# EAGLE board Mixer (EAGLE 7.7.0)
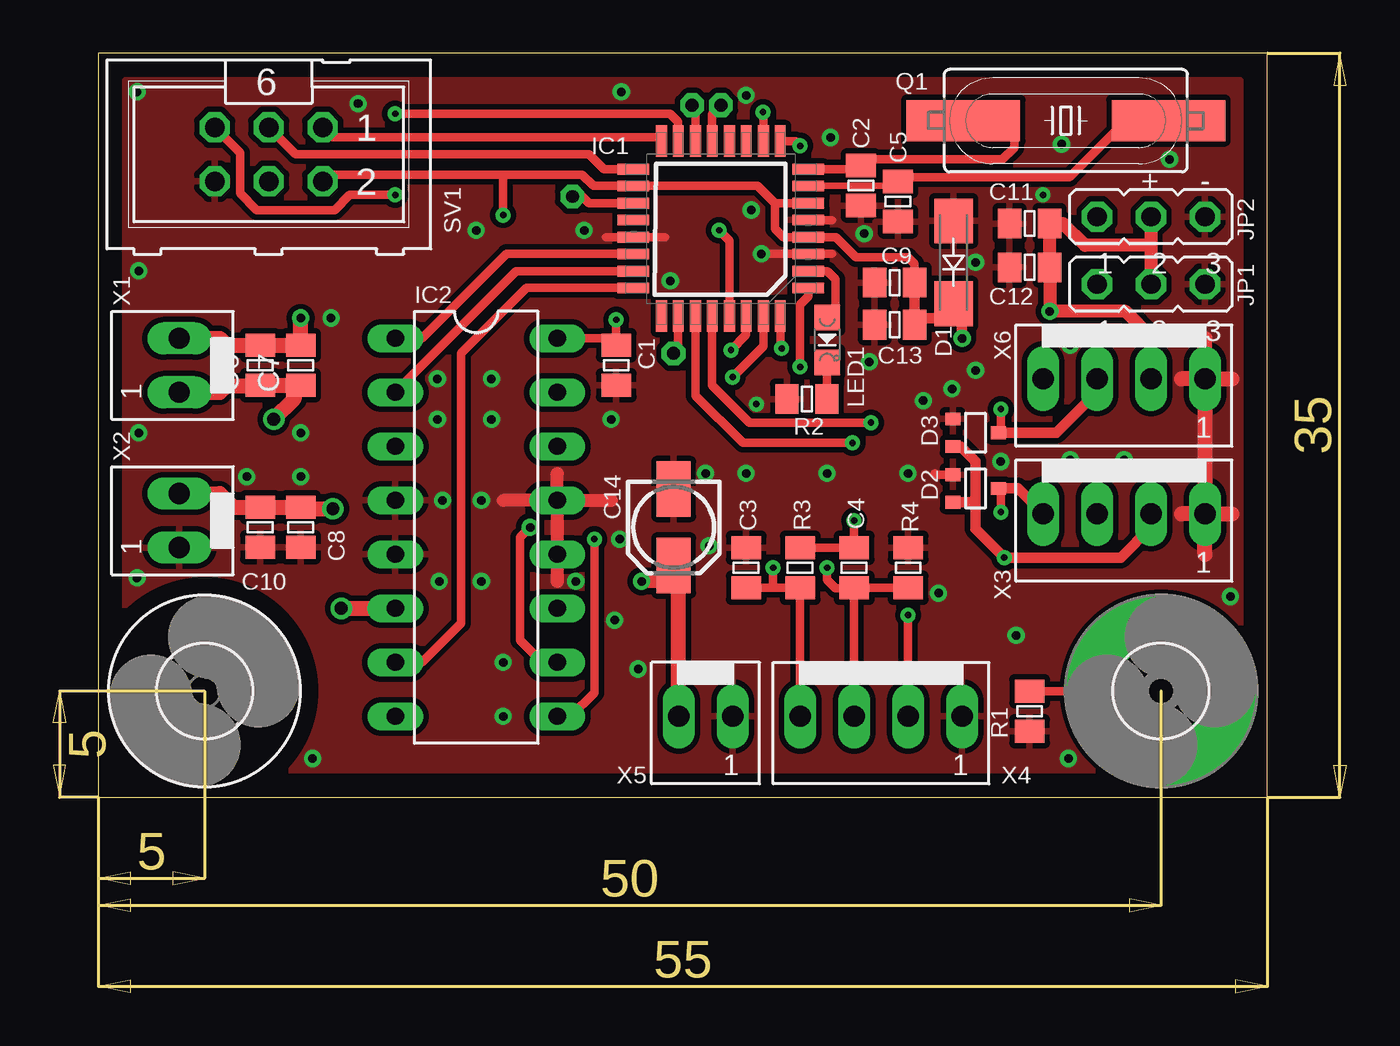
[diagram p0: board, top side]
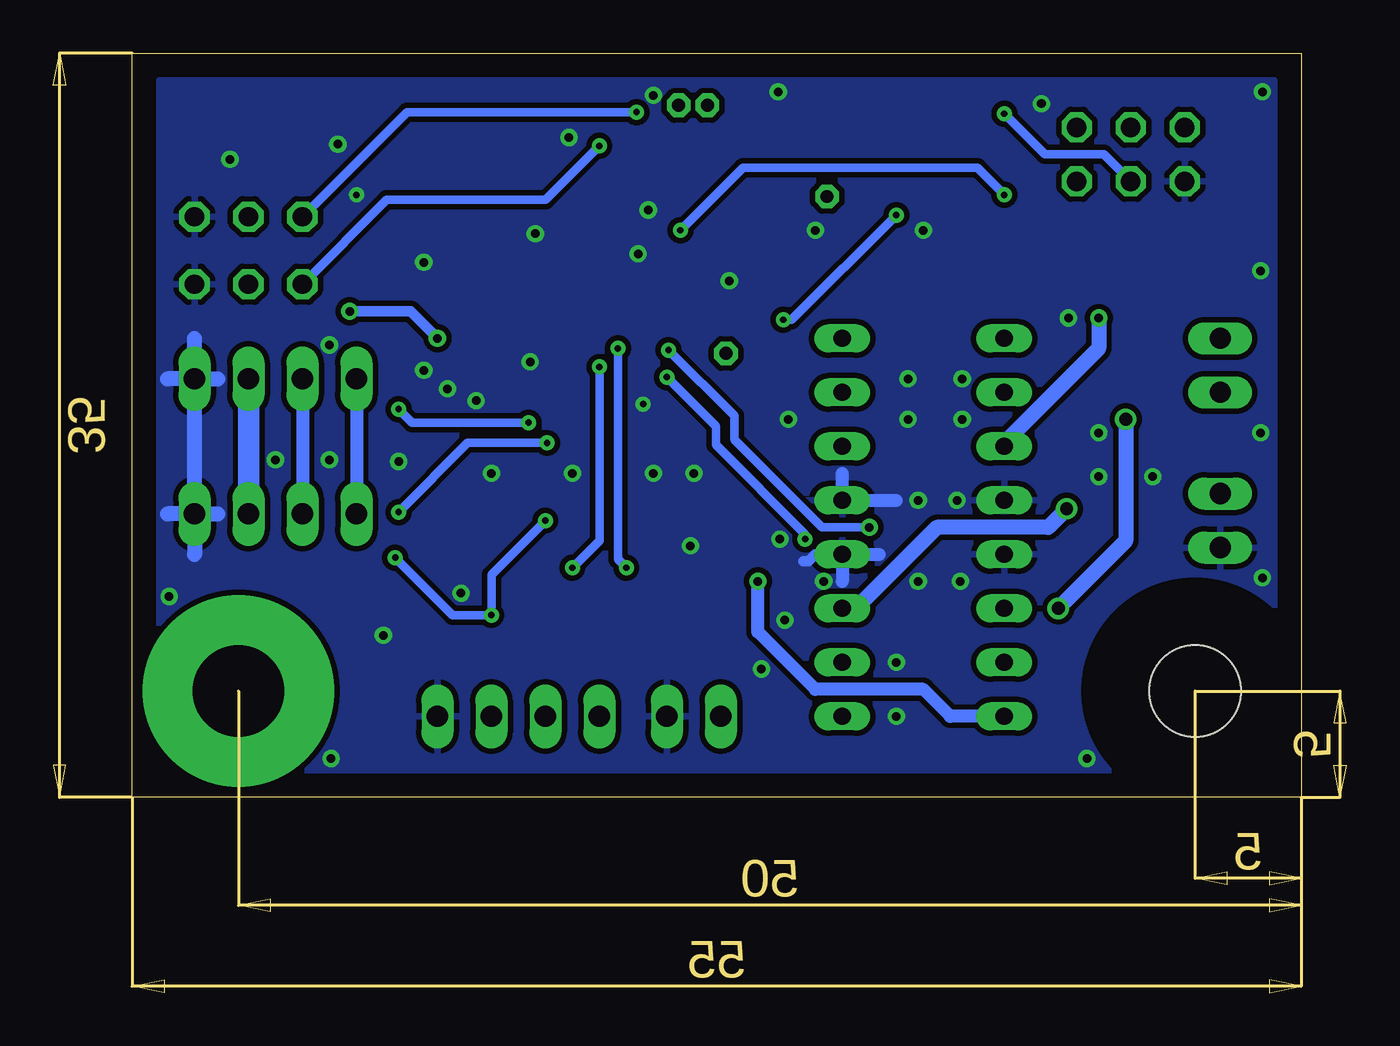
[diagram p1: board, bottom side, seen from below]

Size 55 x 35 mm. Coordinates in mm from the lower left corner, seen from the top.
Outline: 0,0 55,0 55,35 0,35 0,0
Copper layers (1*16): Top 0.035mm / dielectric 1.5mm / Bottom 0.035mm
Design rules "cadsoft": minimum track width 10mil, minimum drill 24mil, track to track 8mil, track to pad 8mil, pad to pad 8mil, via to via 8mil, smd to smd 8mil, copper to edge 40mil, drill to drill 8mil, minimum pad ring 10mil, minimum via ring 8mil, stop-mask expansion 4mil, vias tented up to drill 0mil, thermal gap 10mil
Net classes: 0 default: clearance 0.205 mm

## Footprints (pad centres in the part's own frame; a part is rotated, then mirrored left to right if it is on the bottom)
0805CRH = smd 1.092 x 1.397: 1 -0.94,0; 2 0.94,0
153CLV-0405 = smd 2.6 x 1.6: + 1.8,0; - -1.8,0
SMA-DO214AC = smd 2.1 x 1.8: A -1.95,0; K 1.95,0
SOT323-3 = smd 0.6 x 0.7: 1 -0.65,-1.075; 2 0.65,-1.075; 3 0,1.075
4,3-PAD = drill 4.3 pad 9: B4,3 0,0
4,3 = hole 4.3: 0,0
QFP80P900X900X120-32N = smd 1.473 x 0.508: 1 -4.115,2.794; 2 -4.115,2.007; 3 -4.115,1.194; 4 -4.115,0.406; 5 -4.115,-0.406; 6 -4.115,-1.194; 7 -4.115,-2.007; 8 -4.115,-2.794; 17 4.115,-2.794; 18 4.115,-2.007; 19 4.115,-1.194; 20 4.115,-0.406; 21 4.115,0.406; 22 4.115,1.194; 23 4.115,2.007; 24 4.115,2.794 | smd 0.508 x 1.473: 9 -2.794,-4.115; 10 -2.007,-4.115; 11 -1.194,-4.115; 12 -0.406,-4.115; 13 0.406,-4.115; 14 1.194,-4.115; 15 2.007,-4.115; 16 2.794,-4.115; 25 2.794,4.115; 26 2.007,4.115; 27 1.194,4.115; 28 0.406,4.115; 29 -0.406,4.115; 30 -1.194,4.115; 31 -2.007,4.115; 32 -2.794,4.115
DIL16 = drill 0.813 long: 1 -8.89,-3.81; 2 -6.35,-3.81; 3 -3.81,-3.81; 4 -1.27,-3.81; 5 1.27,-3.81; 6 3.81,-3.81; 7 6.35,-3.81; 8 8.89,-3.81; 9 8.89,3.81; 10 6.35,3.81; 11 3.81,3.81; 12 1.27,3.81; 13 -1.27,3.81; 14 -3.81,3.81; 15 -6.35,3.81; 16 -8.89,3.81
JP2 = drill 0.914 octagon: 1 -2.54,0; 2 0,0; 3 2.54,0
CHIPLED_0805 = smd 1.2 x 1.2: A 0,-1.05; C 0,1.05
LSP06 = drill 0.61 octagon: MP 0,0
HC49UP = smd 5.334 x 1.93: 1 -4.826,0; 2 4.826,0
ML6 = drill 0.914 octagon: 1 -2.54,-1.27; 2 -2.54,1.27; 3 0,-1.27; 4 0,1.27; 5 2.54,-1.27; 6 2.54,1.27
NSL25-2G = drill 1 long: 1 -1.27,0; 2 1.27,0
NSL25-4G = drill 1 long: 1 -3.81,0; 2 -1.27,0; 3 1.27,0; 4 3.81,0

## Placement (x,y rotation side)
C1  100n  [0805CRH]  24.37,20.32 270 top
C2  22p  [0805CRH]  35.88,28.77 90 top
C3  100n  [0805CRH]  30.48,10.79 90 top
C4  100n  [0805CRH]  38.1,10.79 90 top
C5  22p  [0805CRH]  37.62,28.02 90 top
C6  1u  [0805CRH]  7.62,20.32 90 top
C7  100n  [0805CRH]  9.53,20.32 90 top
C8  1u  [0805CRH]  9.53,12.7 270 top
C9  100n  [0805CRH]  37.47,24.21 180 top
C10  100n  [0805CRH]  7.62,12.7 270 top
C11  10u/16V  [0805CRH]  43.81,26.99 180 top
C12  100n  [0805CRH]  43.81,24.92 180 top
C13  1u  [0805CRH]  37.47,22.23 180 top
C14  47µ  [153CLV-0405]  27.07,12.7 270 top
D1  SMAJ5.0CA  [SMA-DO214AC]  40.24,25.16 270 top
D2  NUP1301U_115  [SOT323-3]  41.27,14.53 270 top
D3  NUP1301U_115  [SOT323-3]  41.27,17.14 270 top
H1  MOUNT-PAD-ROUND4.3  [4,3-PAD]  50,5 0 top
H2  MOUNT-HOLE4.3  [4,3]  5,5 0 top
IC1  ATMEGA328P-AU  [QFP80P900X900X120-32N]  29.29,26.75 180 top
IC2  L293D  [DIL16]  17.78,12.7 270 top
JP1  JP2E  [JP2]  49.53,24.13 0 top
JP2  JP2E  [JP2]  49.53,27.3 0 top
LED1  YE  [CHIPLED_0805]  34.29,21.51 180 top
LSP1  LSP06  [LSP06]  22.3,28.26 0 top
LSP2  LSP06  [LSP06]  27.07,20.88 0 top
LSP3  LSP06  [LSP06]  27.94,32.54 90 top
LSP4  LSP06  [LSP06]  29.29,32.54 90 top
Q1  16MHz  [HC49UP]  45.52,31.83 0 top
R1  0R  [0805CRH]  43.81,4.05 90 top
R2  330R  [0805CRH]  33.34,18.73 180 top
R3  10k  [0805CRH]  33.02,10.79 270 top
R4  10k  [0805CRH]  35.56,10.79 270 top
SV1  ATMEL_ISP_6  [ML6]  8.02,30.24 180 top
X1  NSL25-2G  [NSL25-2G]  3.81,20.32 90 top
X2  NSL25-2G  [NSL25-2G]  3.81,13.02 90 top
X3  NSL25-4G  [NSL25-4G]  48.26,13.34 180 top
X4  NSL25-4G  [NSL25-4G]  36.83,3.81 180 top
X5  NSL25-2G  [NSL25-2G]  28.57,3.81 180 top
X6  NSL25-4G  [NSL25-4G]  48.26,19.68 180 top

## Library data of the parts
C1-C14 R1-R4 = rcl_jci
D1 = Eltra_Teile
D2 D3 = Diode
H1 H2 = holes_sv
IC1 = Atmel; PACKAGE: TQFP-32; SUPPLIER: Atmel
IC2 = st-microelectronics; MPN: L293D; OC_FARNELL: 9589619; OC_NEWARK: 56P8249
JP1 JP2 = jumper_jci
LED1 = led_jci
LSP1-LSP4 = solpad_jci
Q1 = crystal_jci
SV1 = isp_jci
X1-X6 = con-nsk_jci

## Nets
+12V: C14.+ IC2.8 X5.2
ADC6: IC1.19 LSP1.MP
ENABLE_MIXER: IC1.31 IC2.9
ENABLE_MIXER_MOVE: IC1.22 IC2.1
GND: C1.2 C2.1 C3.2 C4.2 C5.1 C8.2 C9.2 C10.2 C11.2 C12.2 C13.2 C14.- D1.A D2.1 D3.1 IC1.3 IC1.5 IC1.21 IC2.4 IC2.5 IC2.12 IC2.13 JP1.3 JP2.3 R1.1 R2.2 SV1.6 X2.1 X3.1 X4.1 X5.1 X6.1
LED: IC1.2 LED1.A
MISO: IC1.16 SV1.1
MIXER: C8.1 C10.1 IC2.11 X2.2
MIXER_SIG: IC1.30 IC2.10
MOSI: IC1.15 SV1.4
N$1: H1.B4,3 R1.2
N$2: LED1.C R2.1
N$3: IC1.26 LSP2.MP
N$4: C5.2 IC1.7 Q1.2
N$5: C2.2 IC1.8 Q1.1
N$6: IC1.14 LSP3.MP
N$7: IC1.13 LSP4.MP
RESET: IC1.29 SV1.5
RUEHRER+: C6.2 C7.2 IC2.3 X1.2
RUEHRER-: C6.1 C7.1 IC2.6 X1.1
RUEHRER_+_SIG: IC1.23 IC2.2
RUEHRER_-_SIG: IC1.24 IC2.7
SCK: IC1.17 SV1.3
SCL: D3.3 IC1.28 X3.3 X6.3
SDA: D2.3 IC1.27 X3.4 X6.4
SERVO_1: IC1.9 JP1.1
SERVO_2: IC1.10 JP2.1
TASTER_OBEN: C3.1 IC1.32 R3.2 X4.4
TASTER_UNTEN: C4.1 IC1.1 R4.2 X4.3
VCC: C1.1 C9.1 C11.1 C12.1 C13.1 D1.K D2.2 D3.2 IC1.4 IC1.6 IC1.18 IC2.16 JP1.2 JP2.2 R3.1 R4.1 SV1.2 X3.2 X4.2 X6.2

## Tracks (layer width: path | path; a pad name or v marks a point on that pad's centre or on a via)
+12V  (via drill 0.4)
  Top 0.6: v25.56,10.16 27.3,10.16
  Top 0.7: X5.2 27.3,10.16 27.3,10.66 C14.+
  Bottom 0.6: IC2.8 16.51,3.81 17.78,5.08 22.86,5.08 25.56,7.78 v25.56,10.16
ADC6
  Top 0.4: LSP1.MP 22.78,28.26 23.1,27.94 IC1.19
ENABLE_MIXER  (via drill 0.3)
  Top 0.4: IC1.31 31.3,21.22 v29.84,19.76 | IC2.9 22.23,3.81 23.34,4.92 v23.34,12.14
  Bottom 0.4: v29.84,19.76 27.54,17.46 27.54,16.59 23.34,12.38 v23.34,12.14
ENABLE_MIXER_MOVE
  Top 0.4: IC1.22 19.21,25.56 15.24,21.59 IC2.1
GND  (via drill 0.3, 0.4)
  Top 0.4: 26.67,26.35 26.66,26.34 IC1.21 23.9,26.34 23.89,26.35 | 31.04,25.56 34.53,25.56 | IC1.5 33.41,27.15 34.53,27.15 | D2.1 39.43,15.18 39.37,15.24
  Top 0.6: IC2.13 21.59,15.24 | IC2.13 21.59,10.16 | IC2.13 19.05,13.97 | IC2.13 24.13,13.97
  Top 0.7: X6.1 53.34,19.68 | X6.1 50.96,19.68 | X6.1 52.07,21.59 | X6.1 X3.1 | 52.07,11.43 X3.1 | X3.1 53.34,13.34 | X3.1 50.96,13.34
  Bottom 0.5: 22.7,11.43 22.86,11.43 23.18,11.11 23.42,11.11
  Bottom 0.6: 21.59,15.24 IC2.13 19.05,13.97 | IC2.12 19.84,11.43 | IC2.12 21.59,10.16 | IC2.12 22.7,11.43
  Bottom 0.7: X3.1 52.07,11.43 | X3.1 X6.1 | X6.1 52.07,21.59 | X6.1 53.34,19.68 | X6.1 50.96,19.68 | X3.1 53.34,13.34 | X3.1 50.96,13.34
  other vias: 36.04,26.51 30.72,27.62 26.91,24.29 22.86,26.67 24.61,33.18 10.08,1.83 1.83,10.32 1.83,33.18 45.64,1.83 53.26,9.45 34.29,15.24 30.48,15.24 24.13,17.78 41.27,20.08 45.32,30.72 50.4,30 31.19,25.56 41.27,25.16 30.96,18.49 36.27,20.48 45.72,21.27 42.47,15.8 45.72,15.88 48.26,15.88 6.99,15.08 9.53,15.08 9.53,17.14 10.95,22.54 15.95,19.68 15.95,17.78 18.49,19.68 18.49,17.78 16.03,10.16 18.02,10.16 19.05,3.81 17.78,26.67 12.22,32.62 34.45,31.04 44.45,28.34 30.48,33.02 24.29,8.33 25.4,6.03 24.53,12.14 19.05,6.35 40.16,19.21 38.81,18.65 39.53,9.6 43.18,7.62 38.1,15.24 28.73,11.83 28.57,15.24 22.46,10.16 18.02,13.97 16.19,13.97 1.91,24.77 1.91,17.14
  pour Top (isolate 0.254): 1.27,33.73 53.73,33.73 53.73,1.27 1.27,1.27
  pour Bottom (isolate 0.254): 1.27,1.27 53.73,1.27 53.73,33.73 1.27,33.73
LED
  Top 0.4: IC1.2 34.31,24.74 34.69,24.37 34.69,22.72 LED1.A
MISO
  Top 0.4: IC1.16 26.5,31.04 11.03,31.04 SV1.1
MIXER  (via drill 0.6)
  Top 0.5: 7.61,13.65 C10.1 | C8.1 9.59,13.57
  Top 0.7: X2.2 5.71,14.29 6.35,13.65 7.61,13.65 | C10.1 C8.1 | 9.59,13.57 v11.03,13.57
  Bottom 0.7: v11.03,13.57 11.91,12.7 17.14,12.7 20.95,8.89 IC2.11
MIXER_SIG  (via drill 0.3, 0.4)
  Top 0.4: IC1.30 30.48,21.75 v29.77,21.03 | v20.32,12.7 19.84,12.22 19.84,7.38 20.88,6.35 IC2.10
  Bottom 0.4: v29.77,21.03 26.67,17.94 26.67,16.83 22.54,12.7 v20.32,12.7
MOSI  (via drill 0.3)
  Top 0.4: IC1.15 27.28,31.77 26.91,32.15 v13.97,32.15
  Bottom 0.4: v13.97,32.15 12.06,30.24 9.29,30.24 SV1.4
N$1
  Top 0.4: R1.2 43.83,5 H1.B4,3
N$2
  Top 0.4: LED1.C 34.28,20.45 R2.1
N$3
  Top 0.4: IC1.26 27.28,21.09 LSP2.MP
N$4
  Top 0.305: IC1.7 37.5,28.76
  Top 0.4: 37.5,28.76 C5.2 37.91,29.17 45.68,29.17 48.34,31.83 Q1.2
N$5
  Top 0.4: IC1.8 35.71,29.54 C2.2 36.17,30 42.55,30 43.1,30.56 43.1,31.04 42.31,31.83 Q1.1
N$6
  Top 0.4: IC1.14 28.1,32.39 LSP3.MP
N$7
  Top 0.4: IC1.13 28.88,32.14 LSP4.MP
RESET  (via drill 0.3)
  Top 0.4: v13.97,28.34 11.83,28.34 11.11,27.62 7.46,27.62 6.67,28.42 6.67,30.32 SV1.5 | IC1.29 29.7,26.18 v29.21,26.67
  Bottom 0.4: v13.97,28.34 15.24,29.61 26.27,29.61 v29.21,26.67
RUEHRER+  (via drill 0.4)
  Top 0.5: 7.61,21.27 C6.2
  Top 0.7: X1.2 5.71,21.59 6.03,21.27 7.61,21.27 | C6.2 C7.2 v9.53,22.54
  Bottom 0.7: v9.53,22.54 9.53,21.11 13.97,16.67 IC2.3
RUEHRER-  (via drill 0.6)
  Top 0.5: 7.61,19.37 C6.1
  Top 0.7: X1.1 5.71,19.05 6.03,19.37 7.61,19.37 | C6.1 C7.1 9.21,19.06 9.21,18.73 v8.26,17.78 | v11.43,8.89 IC2.6
  Bottom 0.7: v8.26,17.78 8.26,12.06 v11.43,8.89
RUEHRER_+_SIG
  Top 0.4: IC1.23 19.66,24.74 IC2.2
RUEHRER_-_SIG
  Top 0.4: IC2.7 15.24,6.35 17.07,8.18 17.07,20.88 20.15,23.96 IC1.24
SCK
  Top 0.4: 25.18,29.59 IC1.17 23.8,29.54 23.1,30.24 9.29,30.24 SV1.3
SCL  (via drill 0.3)
  Top 0.4: IC1.28 28.88,19.38 30.64,17.62 v36.35,17.62 | v42.47,18.26 42.47,17.26 D3.3
  Top 0.5: D3.3 45.09,17.14 46.99,19.05 X6.3
  Bottom 0.4: v36.35,17.62 41.83,17.62 v42.47,18.26
  Bottom 0.6: X6.3 X3.3
SDA  (via drill 0.3)
  Top 0.4: IC1.27 28.1,18.89 30.32,16.67 v35.48,16.67 | v42.47,13.41 42.47,14.41 D2.3
  Top 0.5: D2.3 43.26,14.53 X3.4
  Bottom 0.4: v35.48,16.67 39.21,16.67 v42.47,13.41
  Bottom 0.6: X6.4 X3.4
SERVO_1  (via drill 0.3)
  Top 0.4: 32.1,30.88 IC1.9 32.79,30.86 v33.02,30.64
  Bottom 0.4: v33.02,30.64 35.56,28.1 43.02,28.1 JP1.1
SERVO_2  (via drill 0.3)
  Top 0.4: IC1.10 31.3,32.33 v31.27,32.23
  Bottom 0.4: v31.27,32.23 42.07,32.23 JP2.1
TASTER_OBEN  (via drill 0.3)
  Top 0.4: C3.1 31.75,9.86 | 31.75,9.86 R3.2 X4.4 | IC1.32 32.08,21.18 v32.15,21.11 | v31.75,10.79 31.75,9.86
  Bottom 0.4: v32.15,21.11 32.15,11.19 v31.75,10.79
TASTER_UNTEN  (via drill 0.3)
  Top 0.4: X4.3 R4.2 | R4.2 C4.1 | IC1.1 33.41,23.56 33.02,23.18 v33.02,20.24 | v34.29,10.79 34.29,10.24 34.69,9.84 35.55,9.84 R4.2
  Bottom 0.4: v34.29,10.79 33.02,12.06 v33.02,20.24
VCC  (via drill 0.3, 0.4)
  Top 0.4: IC1.6 32.23,27.94 31.83,27.94 | 31.83,27.94 31.83,26.75 32.24,26.34 IC1.4 34.7,26.34 35.64,25.4 38.1,25.4 38.41,25.09 C9.1 | 31.83,27.94 31.01,28.76 IC1.18 23.29,28.76 22.76,29.29 19.05,29.29 | R3.1 R4.1 v35.56,13.02 | 19.05,29.29 10.87,29.29 SV1.2 | X4.2 v38.1,8.57 | v24.37,22.46 C1.1 24.04,21.59 IC2.16 | 19.05,29.29 19.05,27.63 v19.05,27.38 | C13.1 38.72,22.54 | 39.77,22.54 39.77,22.74 D1.K
  Top 0.5: 41.27,13.97 41.27,15.8 40.58,16.5 D3.2 | 41.27,13.97 41.27,12.62 v42.62,11.27 48.1,11.27 49.53,12.7 X3.2 | D2.2 41.18,13.88 41.27,13.97 | C9.1 C13.1 | 38.72,22.54 39.77,22.54 | D1.K 40.64,22.82 v40.64,21.59
  Top 0.6: 49.53,25.96 JP1.2 | X6.2 49.53,21.67 48.34,22.86 v44.77,22.86 44.77,24.91 C12.1 C11.1 45.4,26.99 46.43,25.96 49.53,25.96 | JP2.2 49.53,25.96
  Bottom 0.4: v42.62,11.27 39.93,8.57 v38.1,8.57 38.1,10.48 v35.56,13.02 | v19.05,27.38 23.97,22.46 v24.37,22.46
  Bottom 0.5: v40.64,21.59 41.91,22.86 v44.77,22.86
  Bottom 1: X6.2 X3.2

## Text on the board
tNames: + | -
tDocu: Slider | Mixer | I²C | 12V | Endstops